# Altium PCB PCB Document.PcbDoc
Units mm, origin at the board's own origin, x right, y up, seen from the top; angles counter-clockwise.
Board outline 152.4 x 101.6 mm, 2 copper layers (Top Layer, Bottom Layer); 7 components, 0 nets, 67 pads, 0 vias.
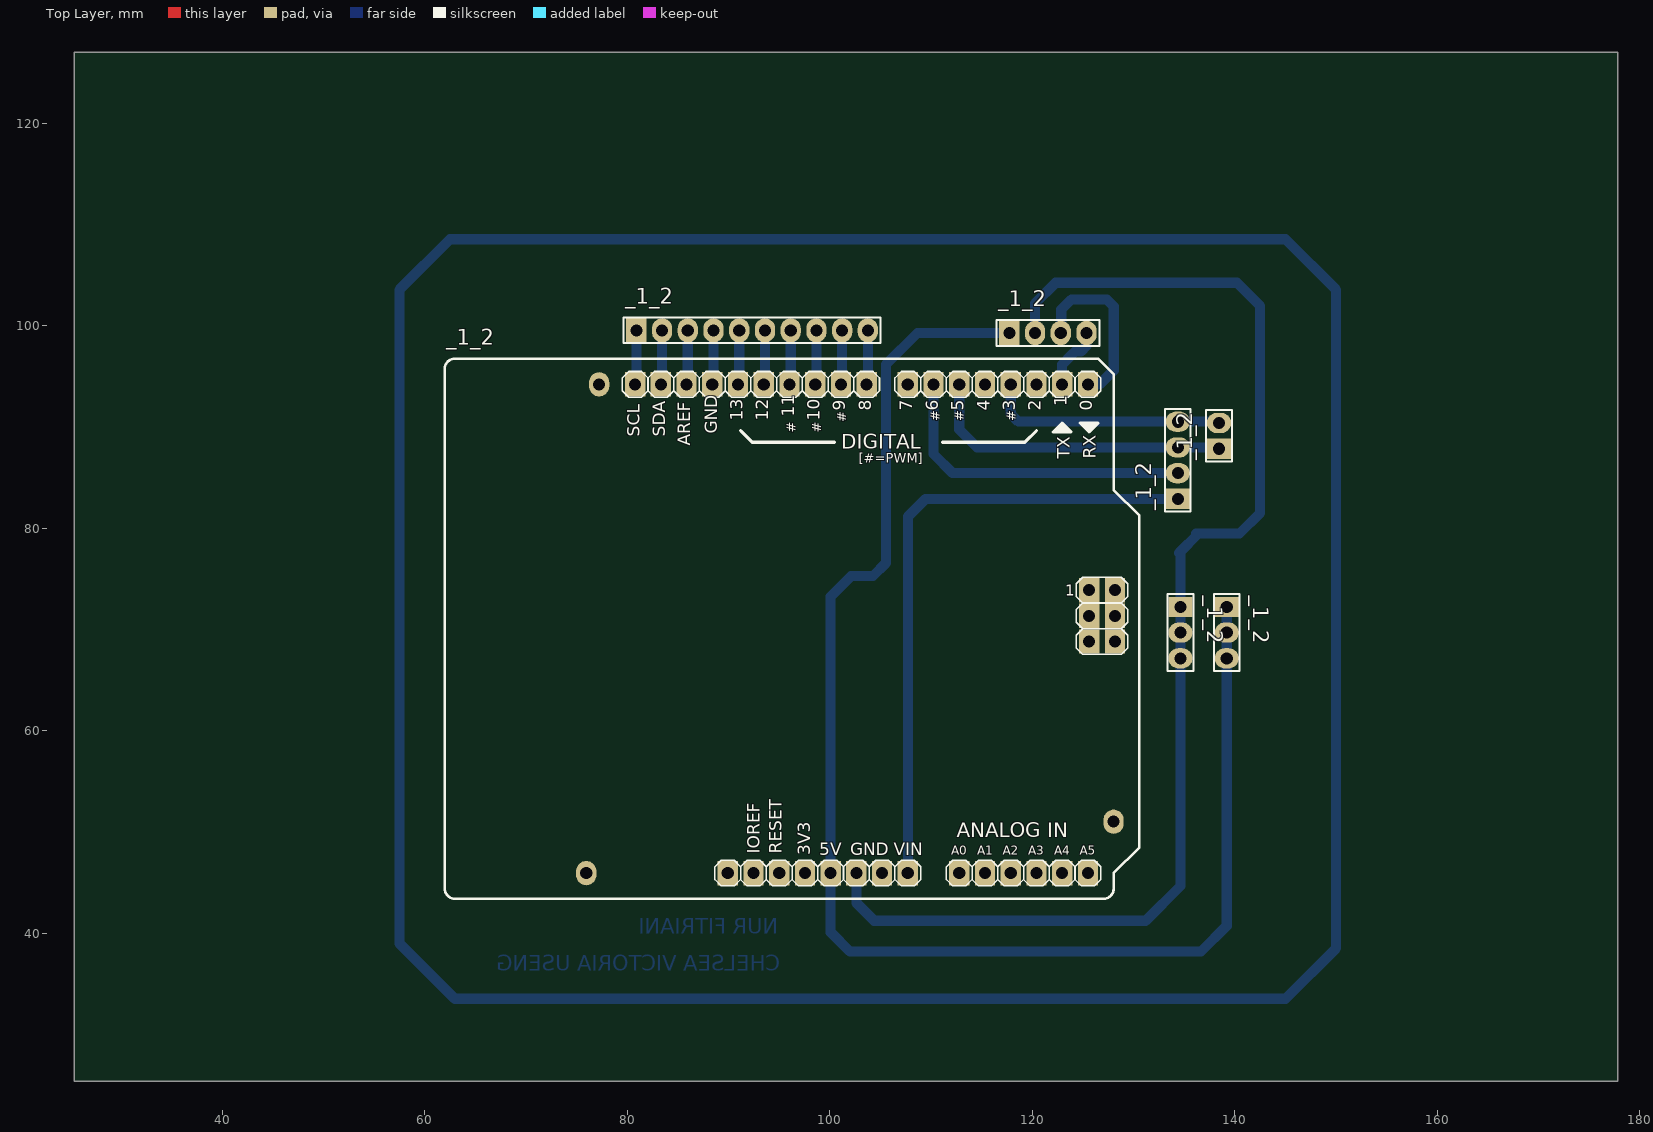
[diagram p0: Top Layer view]
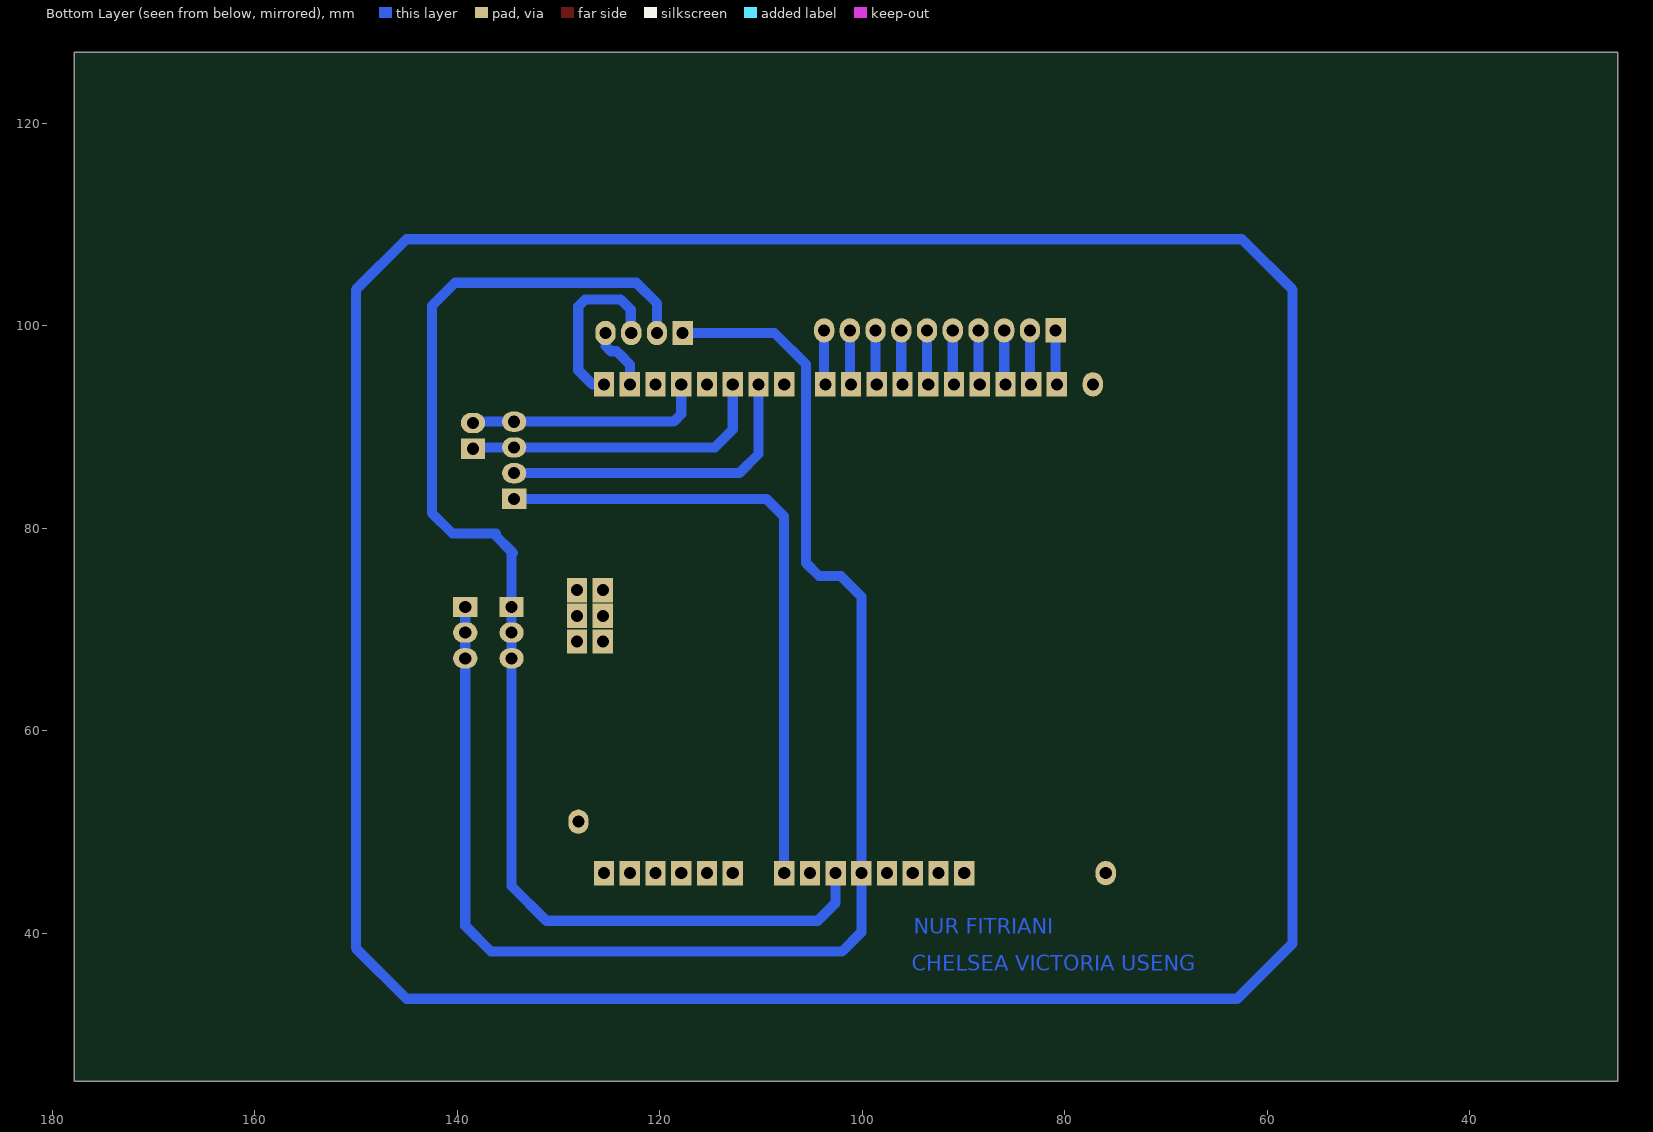
[diagram p1: Bottom Layer view, seen from below]

## Layer stack, top to bottom
Top Solder: solder mask 0.0102, Solder Resist, Dk 3.5
Top Layer: signal copper 0.0356
Dielectric 1: dielectric 0.32, FR-4, Dk 4.8
Bottom Layer: signal copper 0.0356
Bottom Solder: solder mask 0.0102, Solder Resist, Dk 3.5

## Board outline
25.4,25.4 177.8,25.4 177.8,127 25.4,127

## Design rules (kind name [scope] priority, off if disabled: settings)
Clearance [All] p1: gap=0.254 ignorepadtopadclearanceinfootprint=FALSE except(0: Arc-Hole Track-Hole SMDPad-Hole THPad-Hole Via-Hole Fill-Hole Poly-Hole Region-Hole Text-Hole)
PolygonConnect [All] p1: connectstyle=Relief reliefconductorwidth=0.254 reliefentries=4 polygonreliefangle="90 Angle" airgapwidth=0.254
RoutingVias [All] p1: holewidth=0.711 width=1.27 viastyle="Through Hole" minholewidth=0.711 minwidth=1.27 maxholewidth=0.711 maxwidth=1.27
SolderMaskExpansion [All] p1: expansion=0.102
Width [All] p1: maxlimit=1 minlimit=1 preferedwidth=1
30 further rules are at their usual default settings.

## Components (designator, comment, footprint, x,y, rotation, side; value= is the part's Value field where it differs from the comment)
_1_2 "Comment" HDR1X3 139.192,72.238 r270 top
_1_2 "Comment" HDR1X3 134.62,72.238 r270 top
_1_2 "Comment" HDR1X10 80.899,99.543 r0 top
_1_2 "Comment" HDR1X4 134.366,82.906 r90 top
_1_2 "Comment" HDR1X2 138.43,87.859 r90 top
_1_2 "Comment" "Arduino Uno" 98.044,69.952 r0 top
_1_2 "Comment" HDR1X4 117.729,99.289 r0 top

## Footprints (in the part's own frame and the unit in brackets; to place one, negate y for a bottom-side part, rotate by r counter-clockwise, add the part's x,y. Pads: shape width x height; smd on the part's side, far side on the other; paste and mask are expansions set on the pad)
"Arduino Uno" [mm]
  rect 2x2.4 hole 1.2: 0(27.44,24.26) 1(24.9,24.26) 2(22.36,24.26) 3(19.82,24.26) 3V3(-0.5,-24) 4(17.28,24.26) 5(14.74,24.26) 5V(2.04,-24) 6(12.2,24.26) 7(9.66,24.26) 8(5.596,24.26) 9(3.056,24.26) 10(0.516,24.26) 11(-2.024,24.26) 12(-4.564,24.26) 13(-7.104,24.26) A0(14.74,-24) A1(17.28,-24) A2(19.82,-24) A3(22.36,-24) A4(24.9,-24) A5(27.44,-24) AREF(-12.184,24.26) GND1(4.58,-24) GND2(7.12,-24) GND3(-9.644,24.26) ICSP1(27.567,3.94) ICSP2(30.107,3.94) ICSP3(27.567,1.4) ICSP4(30.107,1.4) ICSP5(27.567,-1.14) ICSP6(30.107,-1.14) IOREF(-5.58,-24) NC(-8.12,-24) RESET(-3.04,-24) SCL(-17.264,24.26) SDA(-14.724,24.26) Vin(9.66,-24)
  oval 2x2.4 hole 1.2: H1(-20.82,24.26) H2(-22.09,-24) H3(29.98,-18.92)
  Bottom Layer lines w0.305: -14.724,24.26 -14.47,24.26
  silkscreen extent -36.06,-26.54 32.52,26.8
HDR1X2 [mm] "Connector; Header; 2 Position"
  rect 2x2.4 hole 1.2: 1(0,0)
  oval 2x2.4 hole 1.2: 2(2.54,0)
  silkscreen extent -1.27,-1.27 3.81,1.27
HDR1X3 [mm] "Connector; Header; 3 Position"
  rect 2x2.4 hole 1.2: 1(0,0)
  oval 2x2.4 hole 1.2: 2(2.54,0) 3(5.08,0)
  silkscreen extent -1.27,-1.27 6.35,1.27
HDR1X4 [mm] "Connector; Header; 4 Position"
  rect 2x2.4 hole 1.2: 1(0,0)
  oval 2x2.4 hole 1.2: 2(2.54,0) 3(5.08,0) 4(7.62,0)
  silkscreen extent -1.27,-1.27 8.89,1.27
HDR1X10 [mm] "Connector; Header; 10 Position"
  rect 2x2.4 hole 1.2: 1(0,0)
  oval 2x2.4 hole 1.2: 2(2.54,0) 3(5.08,0) 4(7.62,0) 5(10.16,0) 6(12.7,0) 7(15.24,0) 8(17.78,0) 9(20.32,0) 10(22.86,0)
  silkscreen extent -1.27,-1.27 24.13,1.27

## Nets (pads, with @x,y where several pads share a name; then routed paths per layer and width w, separated by ;. In a path a pad name is that pad's centre, name@x,y a point inside that pad or via, vN(x,y) a via of type N, cw(c..) or ccw(c..) an arc to the next point about the centre after c; other vN are vias at no path point)
pads on no net: _1_2.0 _1_2.1 _1_2.2 _1_2.3 _1_2.3V3 _1_2.4 _1_2.5 _1_2.5V _1_2.6 _1_2.7 _1_2.8 _1_2.9 _1_2.10 _1_2.11 _1_2.12 _1_2.13 _1_2.A0 _1_2.A1 _1_2.A2 _1_2.A3 _1_2.A4 _1_2.A5 _1_2.AREF _1_2.GND1 _1_2.GND2 _1_2.GND3 _1_2.H1 _1_2.H2 _1_2.H3 _1_2.ICSP1 _1_2.ICSP2 _1_2.ICSP3 _1_2.ICSP4 _1_2.ICSP5 _1_2.ICSP6 _1_2.IOREF _1_2.NC _1_2.RESET _1_2.SCL _1_2.SDA _1_2.Vin
copper on no net: | length 823
  Bottom Layer w1: 80.78,94.212 80.899,94.331 80.899,99.543 ; 83.32,94.212 83.439,94.331 83.439,99.543 ; 85.86,94.212 85.979,94.331 85.979,99.543 ; 88.4,94.212 88.519,94.331 88.519,99.543 ; 90.94,94.212 91.059,94.331 91.059,99.543 ; 93.48,94.212 93.599,94.331 93.599,99.543 ; 96.02,94.212 96.139,94.331 96.139,99.543 ; 98.56,94.212 98.679,94.331 98.679,99.543 ; 101.1,94.212 101.219,94.331 101.219,99.543 ; 102.624,45.952 102.624,43.02 104.394,41.25 131.191,41.25 134.62,44.679 134.62,72.238 134.62,77.699 134.747,77.826 ; 103.64,94.212 103.759,94.331 103.759,99.543 ; 107.704,45.952 107.704,81.136 109.474,82.906 134.366,82.906 ; 110.244,94.212 110.244,87.343 112.141,85.446 134.366,85.446 ; 112.784,94.212 112.784,89.756 114.554,87.986 134.366,87.986 138.303,87.986 138.43,87.859 ; 117.729,99.289 108.661,99.289 105.537,96.164 105.537,95.733 105.537,76.556 104.267,75.286 102.108,75.286 100.084,73.262 100.084,45.952 100.084,40.099 101.981,38.202 136.652,38.202 139.192,40.742 139.192,72.238 ; 117.864,94.212 117.864,91.28 118.618,90.526 134.366,90.526 138.303,90.526 138.43,90.399 ; 120.269,99.289 120.269,102.21 122.301,104.242 140.208,104.242 142.494,101.956 142.494,81.509 140.462,79.477 136.144,79.477 ; 122.809,99.289 122.86,99.339 122.86,101.6 123.85,102.591 125.857,102.591 127.356,102.591 128.041,101.905 128.041,95.606 126.647,94.212 125.484,94.212 ; 122.944,94.212 122.944,96.172 123.952,97.18 124.257,97.485 124.816,97.485 125.349,98.019 125.349,99.289 ; 134.493,77.572 136.398,79.477 ; 57.5,39.02 57.5,103.545 62.5,108.545 145,108.545 150,103.545 150,38.545 145,33.545 62.975,33.545 57.5,39.02

## Other copper
Bottom Layer:
  text "NUR FITRIANI" at 94.894,39.954 h1.52
  text "CHELSEA VICTORIA USENG" at 95.123,36.322 h1.52

## Text inside footprints (layer, text, board x,y; h text height)
_1_2: Top Overlay "5V" at 98.941,47.73 h1.21; Top Overlay "A0" at 111.997,47.755 h0.86; Top Overlay "ANALOG IN" at 112.53,49.508 h1.42; Top Overlay "AREF" at 86.23,88.154 h1.21 r90; Top Overlay "1" at 123.249,73.358 h1.08; Top Overlay "GND" at 88.872,89.338 h1.21 r90; Top Overlay "RESET" at 95.258,47.857 h1.21 r90; Top Overlay "3V3" at 98.052,47.73 h1.21 r90; Top Overlay "A1" at 114.537,47.755 h0.86; Top Overlay "A2" at 117.077,47.755 h0.86; Top Overlay "A3" at 119.617,47.755 h0.86; Top Overlay "A4" at 122.157,47.755 h0.86; Top Overlay "A5" at 124.697,47.755 h0.86; Top Overlay "VIN" at 106.307,47.73 h1.21; Top Overlay "GND" at 102.014,47.73 h1.21; Top Overlay "IOREF" at 93.099,47.857 h1.21 r90; Top Overlay "DIGITAL" at 101.151,87.836 h1.42; Top Overlay "TX" at 123.706,86.871 h1.21 r90; Top Overlay "RX" at 126.246,86.846 h1.21 r90; Top Overlay "13" at 91.387,90.621 h1.21 r90; Top Overlay "12" at 93.927,90.621 h1.21 r90; Top Overlay "11" at 96.467,91.024 h1.21 r90; Top Overlay "10" at 99.007,90.621 h1.21 r90; Top Overlay "9" at 101.547,91.628 h1.21 r90; Top Overlay "8" at 104.087,91.628 h1.21 r90; Top Overlay "7" at 108.151,91.628 h1.21 r90; Top Overlay "6" at 110.691,91.628 h1.21 r90; Top Overlay "5" at 113.231,91.628 h1.21 r90; Top Overlay "4" at 115.771,91.628 h1.21 r90; Top Overlay "3" at 118.311,91.628 h1.21 r90; Top Overlay "2" at 120.851,91.628 h1.21 r90; Top Overlay "1" at 123.391,92.031 h1.21 r90; Top Overlay "0" at 125.931,91.628 h1.21 r90; Top Overlay "[#=PWM]" at 102.878,86.465 h0.95; Top Overlay "#" at 96.644,89.452 h0.95 r90; Top Overlay "#" at 99.144,89.452 h0.95 r90; Top Overlay "#" at 113.244,90.552 h0.95 r90; Top Overlay "#" at 118.344,90.552 h0.95 r90; Top Overlay "#" at 110.844,90.552 h0.95 r90; Top Overlay "#" at 101.644,90.452 h0.95 r90; Top Overlay "SCL" at 81.244,89.052 h1.21 r90; Top Overlay "SDA" at 83.773,89.039 h1.21 r90